# Altium PCB PA_8CH_USER_IFC.PcbDoc (part 1 of 2)
Units mil, origin at the board's own origin, x right, y up, seen from the top; angles counter-clockwise.
Board outline 3070.87 x 1771.65 mil, 2 copper layers (Top Layer, Bottom Layer), stack 61.855 mil thick; 75 components, 89 nets, 332 pads, 99 vias.
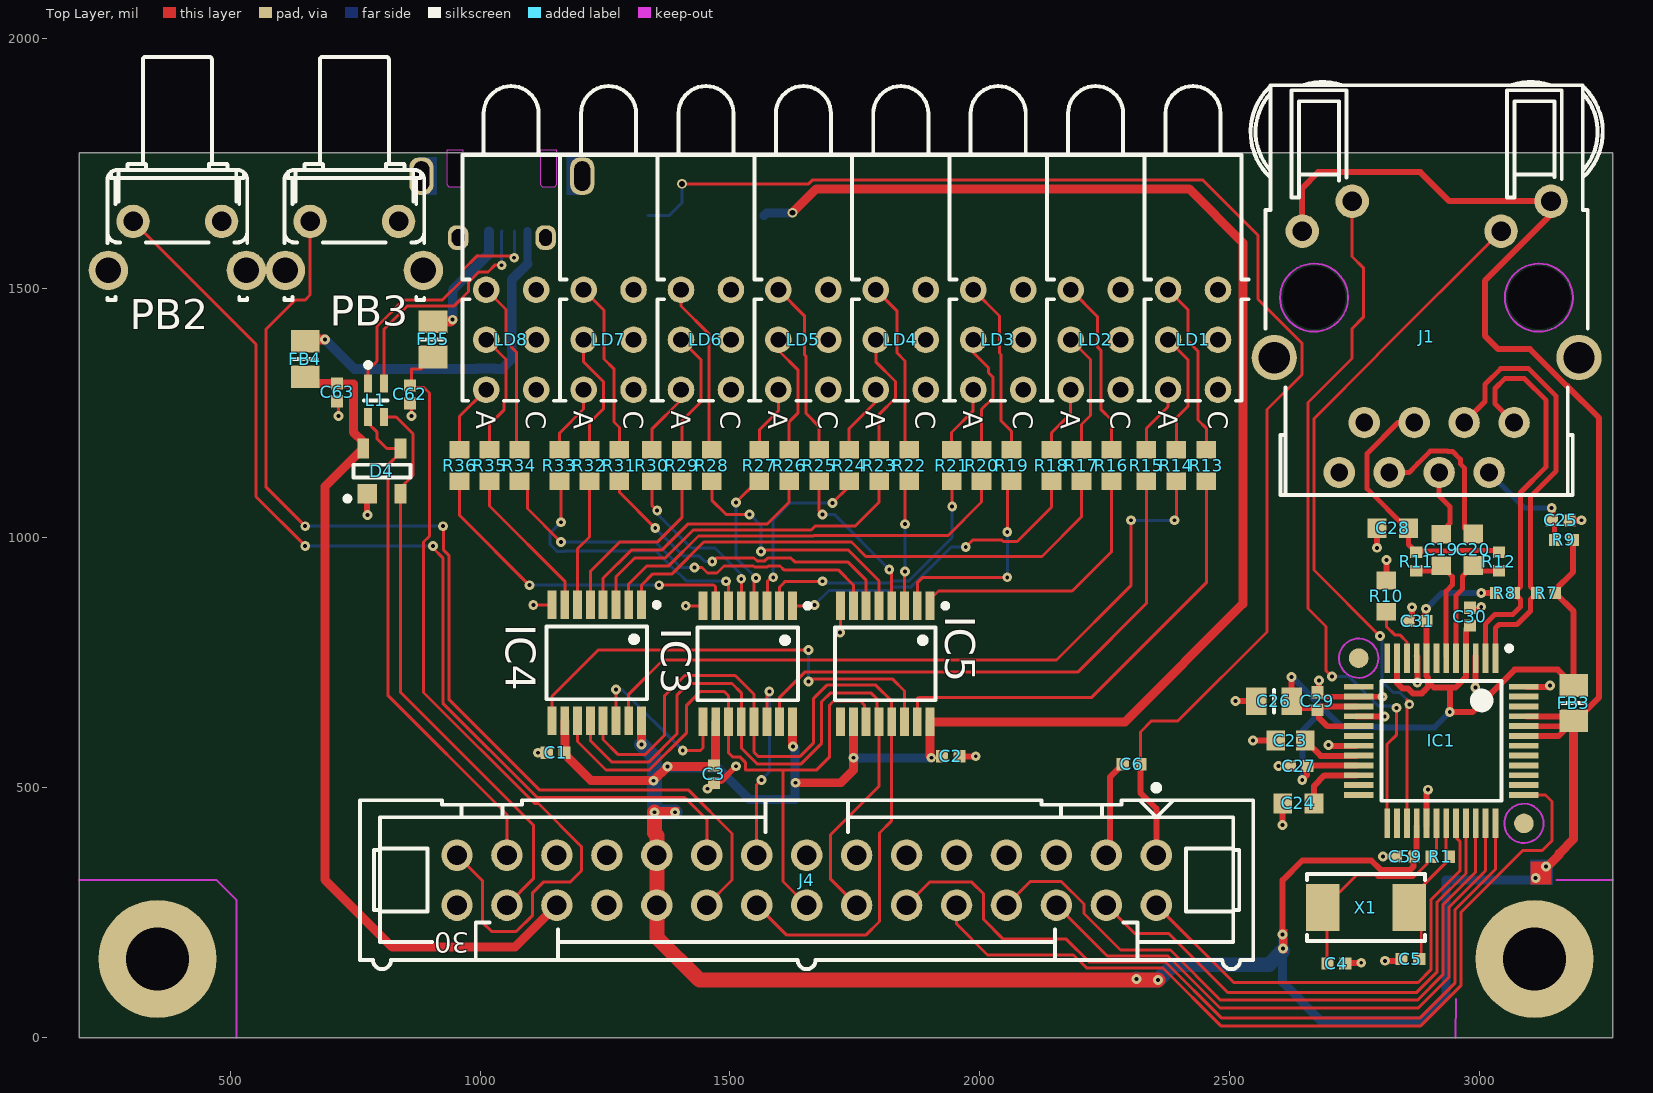
[diagram p0: Top Layer view]
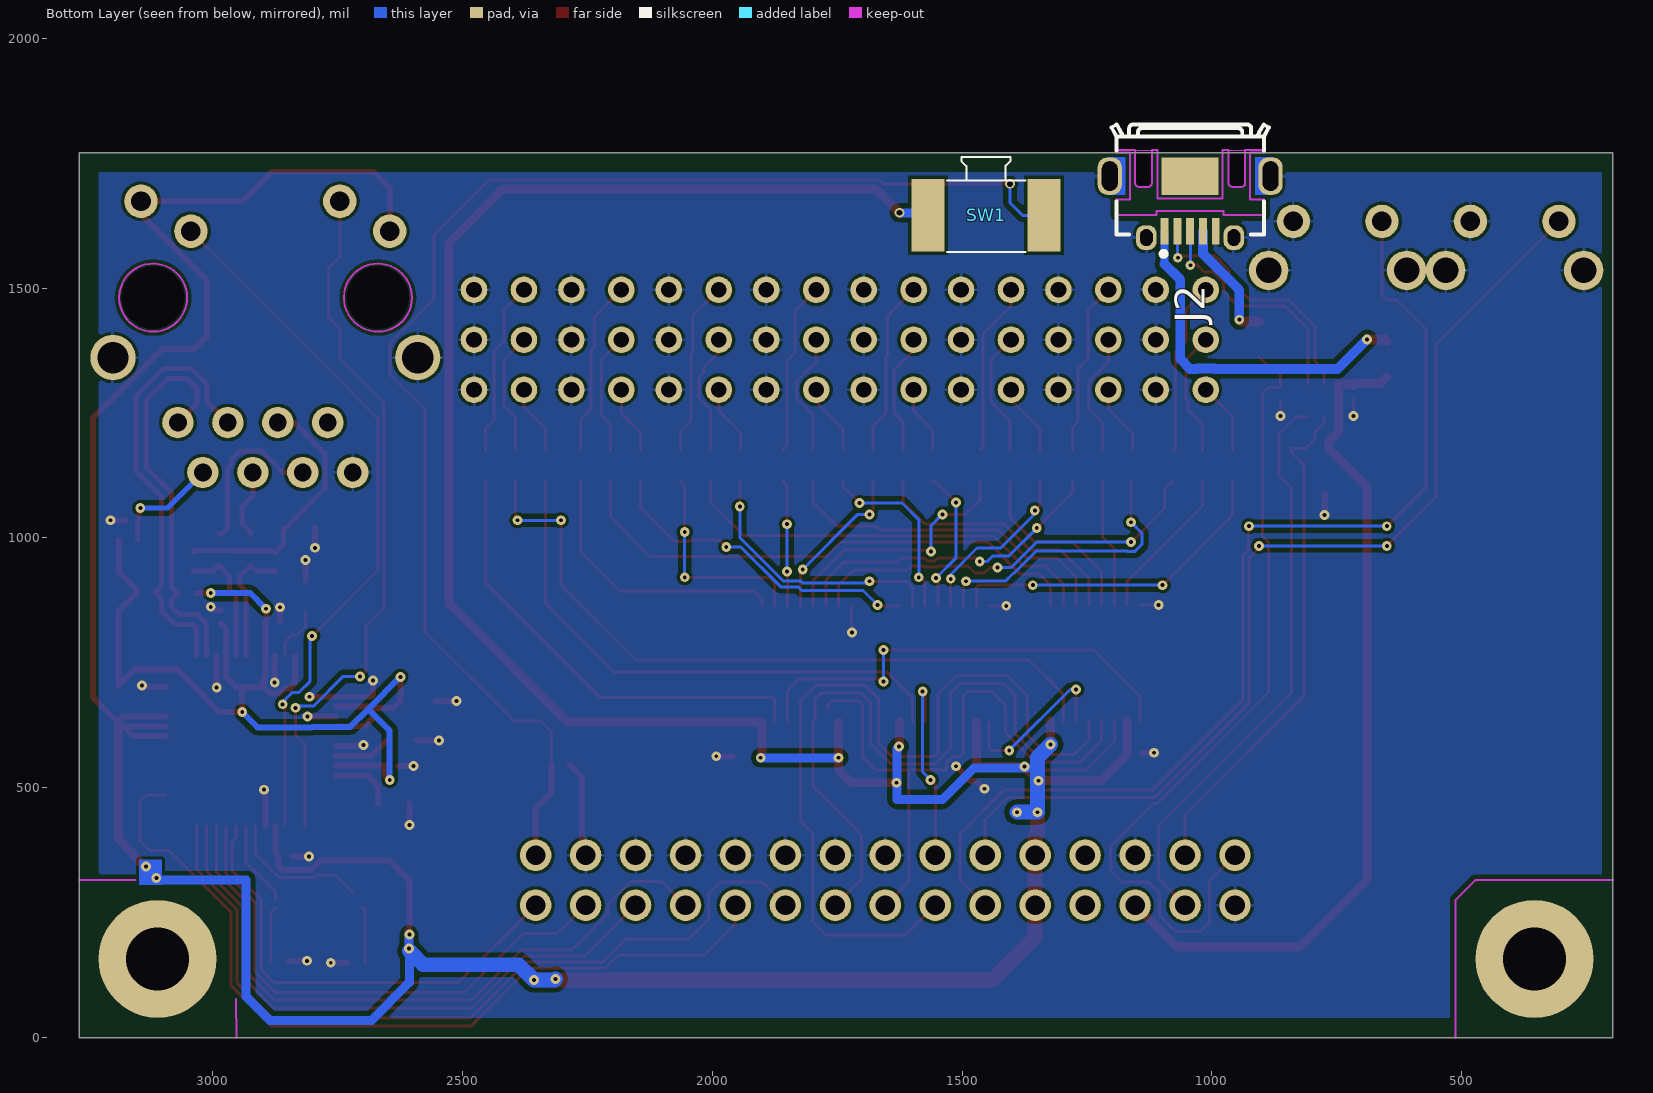
[diagram p1: Bottom Layer view, seen from below]
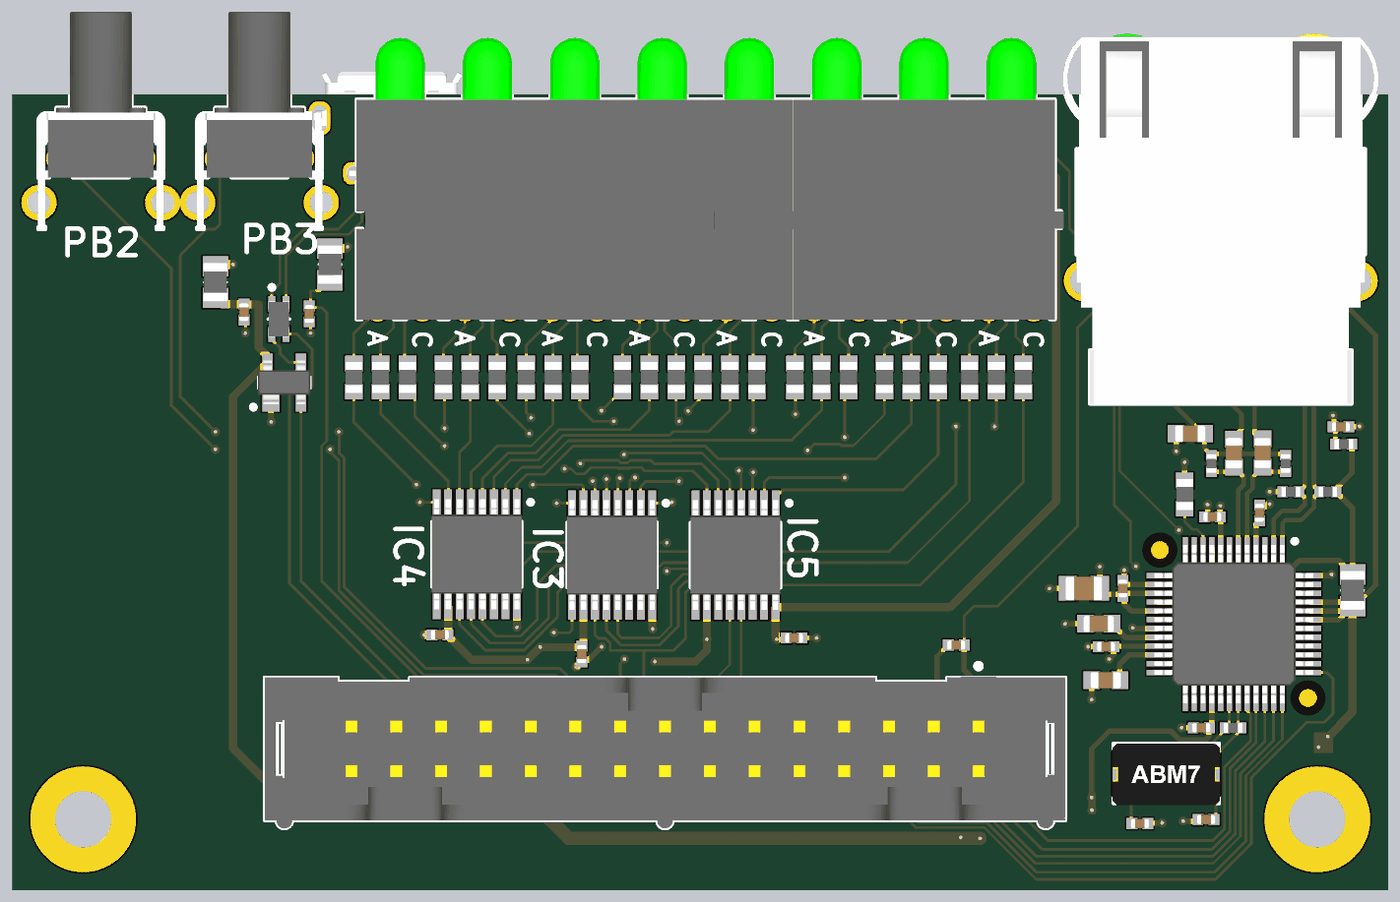
[diagram p2: 3D render of the assembled board from above, using the file's embedded part models]

## Layer stack, top to bottom
Top Solder: solder mask 0.4, Solder Resist, Dk 3.5
Top Layer: signal copper 1.4
Dielectric 1: dielectric 59.0551, FR-4, Dk 4.8
Bottom Layer: signal copper 1.4
Bottom Solder: solder mask 0.4, Solder Resist, Dk 3.5

## Board outline
196.85,0 3267.72,0 3267.72,1771.65 196.85,1771.65

## Design rules (kind name [scope] priority, off if disabled: settings)
Clearance [All] p1: gap=6 ignorepadtopadclearanceinfootprint=FALSE except(0: Arc-Hole Track-Hole SMDPad-Hole THPad-Hole Via-Hole Fill-Hole Poly-Hole Region-Hole Text-Hole; 10: Track-Poly Poly-Poly)
DiffPairsRouting [All] p1: maxlimit=10 minlimit=10 mostfreqgap=10 toplayer_minwidth=10 toplayer_maxwidth=15 toplayer_prefwidth=15 bottomlayer_minwidth=10 bottomlayer_maxwidth=15 bottomlayer_prefwidth=15 maxuncoupledlength=500
HoleSize [All] p1: absolutevalues=TRUE maxlimit=200 minlimit=7.87 maxpercent=80.000 minpercent=20.000
MinimumSolderMaskSliver [All] p1: minsoldermaskwidth=1
PolygonConnect PolygonConnect_pad [IsPad] p1: connectstyle=Relief reliefconductorwidth=6 reliefentries=4 polygonreliefangle="90 Angle" airgapwidth=6
PolygonConnect [All] p2: connectstyle=Direct reliefconductorwidth=10 reliefentries=4 polygonreliefangle="45 Angle" airgapwidth=10
RoomDefinition PA_8CH_USER_IFC [InComponentClass('PA_8CH_USER_IFC')] p1 off: confinementstyle=ConfineIn formatcopy=TRUE lockcomponents=FALSE outline 3370,13 3370,1841 9,1841 9,13
RoomDefinition U_LEDs [InComponentClass('U_LEDs')] p2 off: confinementstyle=ConfineIn formatcopy=TRUE lockcomponents=FALSE outline 3407.76,1921.1 622.76,1921.1 622.76,-13.9 3407.76,-13.9
RoomDefinition U_ETH_IFC [InComponentClass('U_ETH_IFC')] p3 off: confinementstyle=ConfineIn formatcopy=TRUE lockcomponents=FALSE outline 3475.17,1801.1 2519.68,1801.1 2519.68,-33.9 3475.17,-33.9
RoutingVias [All] p1: holewidth=28 width=19.68 viastyle="Through Hole" minholewidth=11.81 minwidth=19.68 maxholewidth=11.81 maxwidth=50
SilkToSilkClearance [All] p1: silktosilkclearance=0
SilkToSolderMaskClearance [IsPad] p1: minsilkscreentomaskgap=0 clearancetoexposedcopper=TRUE
SolderMaskExpansion [All] p1: expansion=4
Width [All] p1: maxlimit=100 minlimit=6 preferedwidth=6
25 further rules are at their usual default settings.

## Classes and differential pairs
component class PA_8CH_USER_IFC: C6 C62 C63 D4 FB4 FB5 J2 J4 L1 PB2 PB3 SW1
component class U_ETH_IFC: C4 C5 C19 C20 C23 C24 C25 C26 C27 C28 C29 C30 C31 C59 FB3 IC1 J1 R1 R7 R8 R9 R10 R11 R12 X1
component class U_LEDs: C1 C2 C3 IC3 IC4 IC5 LD1 LD2 LD3 LD4 LD5 LD6 LD7 LD8 R13 R14 R15 R16 R17 R18 R19 R20 R21 R22 R23 R24 R25 R26 R27 R28 R29 R30 R31 R32 R33 R34 R35 R36
differential pair RJ45_TX: +RJ45_TX_P -RJ45_TX_N
differential pair RJ45_RX: +RJ45_RX_P -RJ45_RX_N
differential pair RJ45_RX_C: +RJ45_RX_C_P -RJ45_RX_C_N

## Components (designator, comment, footprint, x,y, rotation, side; value= is the part's Value field where it differs from the comment)
C1 "100nF" CAPC1005X55N 1151,570 r180 top
C2 "100nF" CAPC1005X55N 1942,563 r0 top
C3 "100nF" CAPC1005X55N 1468,527 r270 top
C4 "22pF" CAPC1005X55N 2714,148 r180 top
C5 "22pF" CAPC1005X55N 2862,157 r0 top
C6 "100nF" CAPC1005X55N 2304,547 r0 top
C19 "10nF" CAPC1608X87N 2924.02,976.1 r90 top
C20 "10nF" CAPC1608X87N 2988.19,976.38 r90 top
C23 "4.7uF" CAPC1709X95N 2622.05,594.49 r180 top
C24 "10nF" CAPC1608X87N 2637.8,468.5 r0 top
C25 "100nF" CAPC1005X55N 3163,1035 r0 top
C26 "10uF" CAPC2012X135N 2589.02,673.58 r180 top
C27 "100nF" CAPC1005X55N 2638.73,543.31 r180 top
C28 "10nF" CAPC1608X87N 2826.77,1019.69 r0 top
C29 "100nF" CAPC1005X55N 2676.02,673.58 r90 top
C30 "100nF" CAPC1005X55N 2981.25,842.52 r90 top
C31 "100nF" CAPC1005X55N 2876.02,833.58 r180 top
C59 "100nF" CAPC1005X55N 2851.33,362.2 r180 top
C62 "100nF" CAPC1005X55N 859.2,1287.4 r90 top
C63 "100nF" CAPC1005X55N 713.54,1291.34 r90 top
D4 "PRTR5V0U2X" SOT190P230X110-4N 803.15,1133.86 r90 top
FB3 "220R@100MHz" INDC2012X105N 3188.98,669.29 r90 top
FB4 "220R@100MHz" INDC2012X105N 649.61,1358.27 r90 top
FB5 "220R@100MHz" INDC2012X105N 905.51,1397.64 r90 top
IC1 "W5500" QFP50P900X900X160-48N 2924,594 r270 top
IC3 "SN74LV595APWT" SOP65P640X120-16N 1535.43,748.03 r270 top
IC4 "SN74LV595APWT" SOP65P640X120-16N 1233.27,750 r270 top
IC5 "SN74LV595APWT" SOP65P640X120-16N 1811.02,748.03 r270 top
J1 "RJ45" TYCO_5-6605308-1 2894.68,1181.1 r180 top locked
J2 "Micro-USB AB 2.0" HIROSE_ZX62RD-AB-5P8 1043.31,1614.17 r0 bottom locked
J4 "Familly" 3M_N2530-6002RB 1653.54,314.96 r180 top locked
L1 "90R@100MHz" IND_MURATA_DLW21S 791.34,1275.59 r270 top
LD1 "Red/Yellow/Green" LED_MENTOR_1882.2781 2426.97,1396.77 r270 top locked
LD2 "Red/Yellow/Green" LED_MENTOR_1882.2781 2231.97,1396.77 r270 top locked
LD3 "Red/Yellow/Green" LED_MENTOR_1882.2781 2036.97,1396.77 r270 top locked
LD4 "Red/Yellow/Green" LED_MENTOR_1882.2781 1841.97,1396.77 r270 top locked
LD5 "Red/Yellow/Green" LED_MENTOR_1882.2781 1646.97,1396.77 r270 top locked
LD6 "Red/Yellow/Green" LED_MENTOR_1882.2781 1451.97,1396.77 r270 top locked
LD7 "Red/Yellow/Green" LED_MENTOR_1882.2781 1256.97,1396.77 r270 top locked
LD8 "Red/Yellow/Green" LED_MENTOR_1882.2781 1061.97,1396.77 r270 top locked
PB2 "Push Button" PB_TYCO_1-1825027-1 393.7,1633.86 r270 top locked
PB3 "Push Button" PB_TYCO_1-1825027-1 748.03,1633.86 r270 top locked
R1 "1M" RESC1005X40N 2922,362 r0 top
R7 "49R9" RESC1005X40N 3133.86,889.76 r0 top
R8 "49R9" RESC1005X40N 3051.18,889.76 r180 top
R9 "10" RESC1005X40N 3169.29,996.06 r180 top
R10 "12k4" RESC1608X55N 2814.02,883.58 r90 top
R11 "49R9" RESC1005X40N 2874.02,952.76 r270 top
R12 "49R9" RESC1005X40N 3039.37,952.76 r270 top
R13 "330" RESC1608X55N 2453.66,1144.96 r90 top
R14 "330" RESC1608X55N 2393.66,1144.96 r90 top
R15 "330" RESC1608X55N 2333.66,1144.96 r90 top
R16 "330" RESC1608X55N 2263.66,1144.96 r90 top
R17 "330" RESC1608X55N 2203.66,1144.96 r90 top
R18 "330" RESC1608X55N 2143.66,1144.96 r90 top
R19 "330" RESC1608X55N 2063.66,1144.96 r90 top
R20 "330" RESC1608X55N 2003.66,1144.96 r90 top
R21 "330" RESC1608X55N 1943.66,1144.96 r90 top
R22 "330" RESC1608X55N 1858.66,1144.96 r90 top
R23 "330" RESC1608X55N 1798.66,1144.96 r90 top
R24 "330" RESC1608X55N 1738.66,1144.96 r90 top
R25 "330" RESC1608X55N 1678.66,1144.96 r90 top
R26 "330" RESC1608X55N 1618.66,1144.96 r90 top
R27 "330" RESC1608X55N 1558.66,1144.96 r90 top
R28 "330" RESC1608X55N 1463.66,1144.96 r90 top
R29 "330" RESC1608X55N 1403.66,1144.96 r90 top
R30 "330" RESC1608X55N 1343.66,1144.96 r90 top
R31 "330" RESC1608X55N 1278.66,1144.96 r90 top
R32 "330" RESC1608X55N 1218.66,1144.96 r90 top
R33 "330" RESC1608X55N 1158.66,1144.96 r90 top
R34 "330" RESC1608X55N 1078.66,1144.96 r90 top
R35 "330" RESC1608X55N 1018.66,1144.96 r90 top
R36 "330" RESC1608X55N 958.66,1144.96 r90 top
SW1 "KSS241G LFS" "KSS241G LFS" 1452,1646 r0 bottom locked
X1 "QSDG25M000-TXC" XTAL_5.0*3.2 2773,260 r0 top

## Footprints (in the part's own frame and the unit in brackets; to place one, negate y for a bottom-side part, rotate by r counter-clockwise, add the part's x,y. Pads: shape width x height; smd on the part's side, far side on the other; paste and mask are expansions set on the pad)
3M_N2530-6002RB [mm] "30 Contacts - Straight .100\" x .100\" Low Profile Four-Wall Header"
  round 1.6 hole 1: 1(-17.78,-1.27) 2(-17.78,1.27) 3(-15.24,-1.27) 4(-15.24,1.27) 5(-12.7,-1.27) 6(-12.7,1.27) 7(-10.16,-1.27) 8(-10.16,1.27) 9(-7.62,-1.27) 10(-7.62,1.27) 11(-5.08,-1.27) 12(-5.08,1.27) 13(-2.54,-1.27) 14(-2.54,1.27) 15(0,-1.27) 16(0,1.27) 17(2.54,-1.27) 18(2.54,1.27) 19(5.08,-1.27) 20(5.08,1.27) 21(7.62,-1.27) 22(7.62,1.27) 23(10.16,-1.27) 24(10.16,1.27) 25(12.7,-1.27) 26(12.7,1.27) 27(15.24,-1.27) 28(15.24,1.27) 29(17.78,-1.27) 30(17.78,1.27)
  silkscreen extent -22.71,-4.85 22.71,4.52, body extent -22.71,-4.11 22.71,4.52, height 9.91
CAPC1005X55N [mm] "Chip Capacitor, Body 1.0x0.55mm, IPC Medium Density"
  rect 0.62x0.62 smd: 1(-0.45,0) 2(0.45,0)
  body extent -0.52,-0.27 0.53,0.28, height 0.55
CAPC1608X87N [mm] "Chip Capacitor, Body 1.6x0.8mm IPC Medium Density"
  rect 0.95x1 smd: 1(-0.8,0) 2(0.8,0)
  body extent -0.87,-0.47 0.88,0.48, height 0.87
CAPC1709X95N [mm] "Capacitor, non-Polarized, Chip; 1.65mm L X 0.85mm W X 0.95mm H,IPC Medium Density"
  rect 0.95x1 smd: 1(-0.75,0) 2(0.75,0)
  body extent -0.87,-0.47 0.88,0.48, height 0.95
CAPC2012X135N [mm] "Chip Capacitor, Body 2.0x1.25mm, IPC Medium Density"
  rect 1.05x1.4 smd: 1(-0.9,0) 2(0.9,0)
  silkscreen extent 0,-0.58 0,0.58, body extent -1.05,-0.67 1.05,0.68, height 1.25
HIROSE_ZX62RD-AB-5P8 [mm] "Right Angle, SMD Micro-USB Type AB - Reverse (Top mount), Shell Through Hole"
  rect 0.4x1.35 smd: 1(1.3,0) 2(0.65,0) 3(0,0) 4(-0.65,0) 5(-1.3,0)
  rrect80% 1.225x1.9 hole 0.8 slot 1.5 at 90 deg: 6(-4.088,-2.8) 6(4.088,-2.8)
  rrect80% 1.05x1.25 hole 0.65 slot 0.85 at 90 deg: 6(-2.225,0.325) 6(2.225,0.325)
  rect 2.9x1.9 smd: PastePad(0,-2.8)
  Top Layer region: 4.2,-3.75 4.2,-1.85 3.3,-1.85 3.3,-1.85 3.3,-3.75
  Top Layer region: -4.2,-1.85 -4.2,-3.75 -3.3,-3.75 -3.3,-3.75 -3.3,-1.85
  Top Layer keep-out lines w0.1: -3.75,-0.825 -1.7,-0.825 -1.7,-1.025 1.7,-1.025 1.7,-0.825 3.75,-0.825 3.75,-1.6 3.05,-1.6 3.05,-4 3.75,-4 3.75,-4.125 2.8,-4.125 2.8,-2.45 ccw(c2.6,-2.45) 2.6,-2.25 2.15,-2.25 ccw(c2.15,-2.45) 1.95,-2.45 1.95,-4.125 1.65,-4.125 1.65,-1.65 -1.65,-1.65 -1.65,-4.125 -1.95,-4.125 -1.95,-2.45 ccw(c-2.15,-2.45) -2.15,-2.25 -2.6,-2.25 ccw(c-2.6,-2.45) -2.8,-2.45 -2.8,-4.125 -3.75,-4.125 -3.75,-4 -3.05,-4 -3.05,-1.6 -3.75,-1.6 -3.75,-0.825
  Keep-Out Layer board cut-out: -2.8,-4.125 -2.8,-2.45 -2.785,-2.373 -2.741,-2.309 -2.676,-2.265 -2.6,-2.25 -2.6,-2.25 -2.15,-2.25 -2.073,-2.265 -2.009,-2.309 -1.965,-2.373 -1.95,-2.45 -1.95,-2.45 -1.95,-4.125
  Keep-Out Layer board cut-out: 1.95,-4.125 1.95,-2.45 1.965,-2.373 2.009,-2.309 2.074,-2.265 2.15,-2.25 2.15,-2.25 2.6,-2.25 2.677,-2.265 2.741,-2.309 2.785,-2.373 2.8,-2.45 2.8,-2.45 2.8,-4.125
  silkscreen extent -4,-5.42 4,1.27, body extent -4.32,-5.42 4.33,0.47, height 2.78
IND_MURATA_DLW21S [mm] "Common Mode Choke Coil, DLW21S Series - Body 2 x 1.2mm"
  rect 0.9x0.4 smd: 1(-0.85,-0.4) 2(0.85,-0.4) 3(0.85,0.4) 4(-0.85,0.4)
  silkscreen extent -1.92,-0.6 0,0.6, body extent -1,-0.6 1,0.6, height 1.4
INDC2012X105N [mm] "Chip Inductor, EIA 0805, Metric 2012, Body 2.0x1.25mm, IPC Medium Density"
  rect 1.15x1.45 smd: 1(-0.9,0) 2(0.9,0)
  silkscreen extent 0,-0.6 0,0.6, body extent -1.1,-0.7 1.1,0.7, height 1.1
"KSS241G LFS" [mm]
  rect 1.7x3.7 smd: 1(-2.95,0) 2(2.95,0)
  silkscreen extent -2,-2.98 1.97,1.88, body extent -3.6,-2.98 3.6,1.7, height 1.65
LED_MENTOR_1882.2781 [mm] "3x LED 3mm (Red+Yellow +Green) PCB Edge Mounting MENTOR 1882.2781"
  round 1.35 hole 0.8: 1(-2.54,1.27) 2(-2.54,-1.27) 3(0,1.27) 4(0,-1.27) 5(2.54,1.27) 6(2.54,-1.27)
  silkscreen extent -12.9,-2.47 3.1,2.83, body extent -12.88,-2.47 3.12,2.98, height 12
PB_TYCO_1-1825027-1 [mm] "Right Angle Micro Miniature Tactile Pushbutton Switche, Round Actuator Length = 5.74mm, FSMRAJ Serie"
  round 1.7 hole 1: 1(0,-2.25) 2(0,2.25)
  round 2 hole 1.3: 3(2.49,-3.505) 4(2.49,3.505)
  silkscreen extent -8.36,-3.56 4,3.56, body extent -8.36,-4.2 4,4.2, height 7.01
QFP50P900X900X160-48N [mm] "QFP, 0.50mm pitch, square, 12 pin X 12 pin, 7.00mm X 7.00mm X 1.60mm Body, IPC Medium Density"
  rect 1.5x0.3 smd: 1(-4.2,2.75) 2(-4.2,2.25) 3(-4.2,1.75) 4(-4.2,1.25) 5(-4.2,0.75) 6(-4.2,0.25) 7(-4.2,-0.25) 8(-4.2,-0.75) 9(-4.2,-1.25) 10(-4.2,-1.75) 11(-4.2,-2.25) 12(-4.2,-2.75) 25(4.2,-2.75) 26(4.2,-2.25) 27(4.2,-1.75) 28(4.2,-1.25) 29(4.2,-0.75) 30(4.2,-0.25) 31(4.2,0.25) 32(4.2,0.75) 33(4.2,1.25) 34(4.2,1.75) 35(4.2,2.25) 36(4.2,2.75)
  rect 0.3x1.5 smd: 13(-2.75,-4.2) 14(-2.25,-4.2) 15(-1.75,-4.2) 16(-1.25,-4.2) 17(-0.75,-4.2) 18(-0.25,-4.2) 19(0.25,-4.2) 20(0.75,-4.2) 21(1.25,-4.2) 22(1.75,-4.2) 23(2.25,-4.2) 24(2.75,-4.2) 37(2.75,4.2) 38(2.25,4.2) 39(1.75,4.2) 40(1.25,4.2) 41(0.75,4.2) 42(0.25,4.2) 43(-0.25,4.2) 44(-0.75,4.2) 45(-1.25,4.2) 46(-1.75,4.2) 47(-2.25,4.2) 48(-2.75,4.2)
  round 1 smd paste-0.51 mask+0.5: FTG1(-4.2,-4.2) FTG2(4.2,4.2)
  Top Layer keep-out circle w0.1: c4.2,4.2 r1
  Top Layer keep-out circle w0.1: c-4.2,-4.2 r1
  silkscreen extent -4.82,-3.05 3.05,3.58, body extent -4.5,-4.5 4.5,4.5, height 1.6
RESC1005X40N [mm] "Chip Resistor, EIA 0402, Metric 1005, Body 1.0x0.5mm, IPC Medium Density"
  rect 0.58x0.62 smd: 1(-0.47,0) 2(0.47,0)
  body extent -0.52,-0.27 0.53,0.28, height 0.4
RESC1608X55N [mm] "Chip Resistor, EIA 0603, Metric 1608, Body 1.6x0.8mm, IPC Medium Density"
  rect 0.9x1 smd: 1(-0.8,0) 2(0.8,0)
  body extent -0.87,-0.47 0.88,0.48, height 0.55
SOP65P640X120-16N [mm] "SOP, 0.65mm pitch; 16 pin, 4.40mm W X 5.00mm L X 1.20mm H body IPC Medium Density"
  rect 1.45x0.45 smd: 1(-2.95,2.275) 2(-2.95,1.625) 3(-2.95,0.975) 4(-2.95,0.325) 5(-2.95,-0.325) 6(-2.95,-0.975) 7(-2.95,-1.625) 8(-2.95,-2.275) 9(2.95,-2.275) 10(2.95,-1.625) 11(2.95,-0.975) 12(2.95,-0.325) 13(2.95,0.325) 14(2.95,0.975) 15(2.95,1.625) 16(2.95,2.275)
  silkscreen extent -3.07,-2.55 1.85,3.17, body extent -3.12,-2.55 3.12,2.55, height 1.2
SOT190P230X110-4N [mm] "SOT143, SOT, 1.90mm Pitch; 4 Pin, 1.30mm W X 2.90mm L X 1.10mm H body, IPC Medium Density"
  rect 1x1 smd: 1(-1.15,0.75)
  rect 1x0.6 smd: 2(-1.15,-0.95) 3(1.15,-0.95) 4(1.15,0.95)
  silkscreen extent -1.52,-1.45 0.33,1.87, body extent -1.25,-1.5 1.25,1.5, height 1.1
TYCO_5-6605308-1 [mm] "1 Port, Yellow/Green LEDs, RJ45 10/100Base-T Ethernet, Mag45 Connector Module With Integrated Magnetics"
  round 1.6 hole 0.9: 1(-4.445,-1.27) 2(-3.175,1.27) 3(-1.905,-1.27) 4(-0.635,1.27) 5(0.635,-1.27) 6(1.905,1.27) 7(3.175,-1.27) 8(4.445,1.27)
  round 2.3 hole 1.6: 9(-7.747,-4.572) 10(7.747,-4.572)
  round 1.7 hole 1: D1(-6.325,-12.522) D2(-3.785,-10.998) D3(6.325,-10.998) D4(3.785,-12.522)
  round 0.5 hole 3.2 unplated mask+1.35: M1(-5.715,-7.62) M2(5.715,-7.62)
  silkscreen extent -8.95,-18.59 8.95,2.41, body extent -8.95,-18.6 8.95,2.41, height 14.97
XTAL_5.0*3.2 [mm]
  rect 1.7x2.4 smd: 1(-2.2,0) 2(2.2,0)
  silkscreen extent -3,-1.7 3,1.7, body extent -3.05,-1.8 3.05,1.7, height 1.44

## Part data
C1 C2 C3 C6 C25 C27 C29 C30 C31 C59 C62 C63: library part CC0402_100NF_16V_10%_X7R, "Non-polarised capacitor", Case=0402, Manufacturer=GENERIC, Manufacturer1 ComponentHeight=0.55mm, Manufacturer1 Example=MURATA, Manufacturer1 Part Number=GRM155R71C104KA88D, Tolerance=±10%, Voltage=16V, Author="CERN DEM JLC", Component Type=Standard, CreateDate=05.12.2013, HelpURL=\\cern.ch\dfs\Applications\Altium\Datasheets\CC0402_X7R_MURATA_GRM.pdf, LatestRevisionDate=03.12.2007, Manufacturer Part Number=CC0402_100NF_16V_10%_X7R, Mounted=Yes, Part Description="SMD Multilayer Chip Ceramic Capacitor", Part Number=CC0402_100NF_16V_10%_X7R, Pin Count=2, Sense=No, SMD=Yes, Socket=No, Status="Not Recommended", TC=X7R
C4 C5: library part CC0402_22PF_50V_5%_NP0, "Non-polarised capacitor", Case=0402, Manufacturer=GENERIC, Manufacturer1 ComponentHeight=0.55mm, Manufacturer1 Example=PHYCOMP, Manufacturer1 Part Number=223886915229, Tolerance=±5%, Voltage=50V, Author="CERN DEM JLC", Component Type=Standard, CreateDate=2007-12-03, HelpURL=\\cern.ch\dfs\Applications\Altium\Datasheets\CC0402_NP0_PHYCOMP.pdf, LatestRevisionDate=2007-12-03, Manufacturer Part Number=CC0402_22PF_50V_5%_NP0, Mounted=Yes, Part Description="SMD Multilayer Chip Ceramic Capacitor", Part Number=CC0402_22PF_50V_5%_NP0, Pin Count=2, SMD=Yes, Socket=No, Status="Not Recommended", Table="Capacitors SMD", TC=NP0
C19 C20 C24 C28: library part CC0603_10NF_50V_5%_C0G, "Non-polarised capacitor", Case=0603, Manufacturer=GENERIC, Manufacturer1 ComponentHeight=0.9mm, Manufacturer1 Example=TDK, Manufacturer1 Part Number=C1608C0G1H103J080AA, Tolerance=±5%, Voltage=50V, Author="CERN DEM JLC", Component Type=Standard, CreateDate=10.12.2014, HelpURL=\\cern.ch\dfs\Applications\Altium\Datasheets\CC0603_C0G_TDK_C.pdf, LatestRevisionDate=10.12.2014, Manufacturer Part Number=CC0603_10NF_50V_5%_C0G, Mounted=Yes, Part Description="SMD Multilayer Chip Ceramic Capacitor", Part Number=CC0603_10NF_50V_5%_C0G, Pin Count=2, Sense=No, SMD=Yes, Socket=No, Status=Preferred, TC=C0G/NP0
C23: library part CC0603_4.7UF_16V_10%_X5R, "Non-polarised capacitor", Case=0603, Manufacturer=GENERIC, Manufacturer1 ComponentHeight=0.95mm, Manufacturer1 Example="TAIYO YUDEN", Manufacturer1 Part Number=EMK107ABJ475KA-T, Tolerance=±10%, Voltage=16V, Author="CERN DEM JLC", Component Type=Standard, CreateDate=16.12.2013, HelpURL=\\cern.ch\dfs\Applications\Altium\Datasheets\CC0603_X7R_TAIYO-YUDEN_HIGH-VALUE.pdf, LatestRevisionDate=16.09.2014, Manufacturer Part Number=CC0603_4.7UF_16V_10%_X5R, Mounted=Yes, Part Description="SMD Multilayer Chip Ceramic Capacitor", Part Number=CC0603_4.7UF_16V_10%_X5R, Pin Count=2, Sense=No, SMD=Yes, Socket=No, Status=None, TC=X5R
C26: library part CC0805_10UF_10V_10%_X7R, "Non-polarised capacitor", Case=0805, Manufacturer=GENERIC, Manufacturer1 ComponentHeight=1.35mm, Manufacturer1 Example=MURATA, Manufacturer1 Part Number=GRM21BR71A106KE51L, Tolerance=±10%, Voltage=10V, Author="CERN DEM JLC", Component Type=Standard, CreateDate=2012-04-30, HelpURL=\\cern.ch\dfs\Applications\Altium\Datasheets\CC0805_X7R_MURATA.pdf, LatestRevisionDate=2012-04-30, Manufacturer Part Number=CC0805_10UF_10V_10%_X7R, Mounted=Yes, Part Description="SMD Multilayer Chip Ceramic Capacitor", Part Number=CC0805_10UF_10V_10%_X7R, Pin Count=2, SMD=Yes, Socket=No, Status=Preferred, Table="Capacitors SMD", TC=X7R
D4: "Ultra Low Capacitance Double Rail-to-Rail ESD Protection Diode", Case=SOT143B, Manufacturer="NXP SEMICONDUCTORS", Voltage=5.5V, Author="CERN DEM JLC", Bonding=No, ComponentHeight=1.1mm, Component Type=Standard, CreateDate=22.03.2011, Device=PRTR5V0U2X, HelpURL=\\cern.ch\dfs\Applications\Altium\Datasheets\PRTR5V0U2X.pdf, LatestRevisionDate=22.03.2011, Manufacturer Part Number=PRTR5V0U2X, Mounted=Yes, PackageDescription="SOT143B, SOT, 1.90mm Pitch; 4 Pin, 1.30mm W X 2.90mm L X 1.10mm H body, IPC Medium Density", Part Description="Ultra Low Capacitance (1pF) Double Rail-to-Rail ESD Protection Diode (8kV)", Part Number=PRTR5V0U2X, Pin Count=4, PressFit=No, Sense=No, SMD=Yes, Socket=No
FB3 FB4 FB5: library part IND0805_MURATA_BLM21PG221SN1D, "Inductor", Case=0805, Manufacturer=MURATA, Manufacturer Part Number=BLM21PG221SN1D, Power=2A, Resistance=0.05R, Tolerance=±25%, Author="CERN DEM JLC", ComponentHeight=1.05mm, Component Type=Standard, CreateDate=2010-01-25, HelpURL=\\cern.ch\dfs\Applications\Altium\Datasheets\IND0402_MURATA_BLM21P.pdf, LatestRevisionDate=2010-01-25, Mounted=Yes, Part Description="SMD EMIFIL Suppression Chip Ferrite Bead", Part Number=IND0805_MURATA_BLM21PG221SN1D, Pin Count=2, SMD=Yes, Socket=No, Status=None, Table="Inductors SMD"
IC1: "iEthernet W5500 TCP/IP Performance and High Speed SPI Ethernet Controller", Case=QFP48, Manufacturer=WIZNET, Author="CERN DEM MR", Bonding=No, ComponentHeight=1.6mm, Component Type=Standard, CreateDate=15.02.2018, Device=W5500, HelpURL=\\cern.ch\dfs\Applications\Altium\Datasheets\W5500.pdf, LatestRevisionDate=15.02.2018, Manufacturer Part Number=W5500, Mounted=Yes, PackageDescription="QFP, 0.50mm Pitch, Square, 48 Pin, 7.00mm L X 7.00mm W X 1.60mm H Body, IPC Medium Density", Part Description="iEthernet W5500 TCP/IP Performance and High Speed SPI Ethernet Controller", Part Number=W5500, Pin Count=48, PressFit=No, Sense=No, SMD=Yes, Socket=No
IC3 IC4 IC5: "8-Bit Shift Register With 3-State Output Register", Case=TSSOP16, Manufacturer="TEXAS INSTRUMENTS", Author="CERN DEM JLC", Bonding=No, ComponentHeight=1.2mm, Component Type=Standard, CreateDate=10.05.2012, Device=SN74LV595APWT, HelpURL=\\cern.ch\dfs\Applications\Altium\Datasheets\SN74LV595APWT.pdf, LatestRevisionDate=10.05.2012, Manufacturer Part Number=SN74LV595APWT, Mounted=Yes, PackageDescription="SOP, 0.65mm pitch; 16 pin, 4.40mm W X 5.00mm L X 1.20mm H body IPC Medium Density", Part Description="8-Bit Shift Register With 3-State Output Register", Part Number=SN74LV595APWT, Pin Count=16, PressFit=No, Sense=No, SMD=Yes, Socket=No
J1: library part TYCO_5-6605308-1, "1 Port, Yellow/Green LEDs, RJ45 10/100Base-T Ethernet, Mag45 Connector Module With Integrated Magnetics", Manufacturer="TYCO ELECTRONICS", Manufacturer Part Number=5-6605308-1, Author="CERN DEM JLC", ComponentHeight=15.24mm, Component Type=Standard, CreateDate=23.08.2012, Family=RJ45, HelpURL=\\cern.ch\dfs\Applications\Altium\Datasheets\TYCO_5-6605308-1.pdf, LatestRevisionDate=23.08.2012, Mounted=Yes, Part Description="1 Port, Yellow/Green LEDs, RJ45 10/100Base-T Ethernet, Mag45 Connector Module With Integrated Magnetics", Part Number=TYCO_5-6605308-1, Pin Count=14, PressFit=No, Sense=No, SMD=No, Socket=No, Status=None
J2: library part HIROSE_ZX62RD-AB-5P8, "5 Pin + 1 Shield USB Receptacle", Manufacturer="HIROSE (HRS)", Manufacturer Part Number=ZX62RD-AB-5P8, Author="CERN DEM JLC", ComponentHeight=2.35mm, ComponentLink1Description=Package-Drawing, ComponentLink1URL=\\cern.ch\dfs\Applications\Altium\Datasheets\HIROSE_ZX62RD-AB-5P8_Package-Drawing.pdf, Component Type=Standard, CreateDate=29.10.2014, Family="Micro-USB AB 2.0", HelpURL=\\cern.ch\dfs\Applications\Altium\Datasheets\HIROSE_ZX62RD-AB-5P8.pdf, LatestRevisionDate=29.10.2014, Mounted=Yes, Part Description="Micro-USB 2.0 Right Angle, SMD Type AB - Reverse (Top mount), Shell Through Hole", Part Number=HIROSE_ZX62RD-AB-5P8, Pin Count=7, PressFit=No, Sense=No, SMD=Yes, Socket=No, Status=None
J4: library part 3M_N2530-6002RB, "Connector 30 Male", Manufacturer=3M, Manufacturer Part Number=N2530-6002RB, Author="CERN DEM JLC", ComponentHeight=10.03mm, Component Type=Standard, CreateDate=11.02.2009, Family="Header 30", HelpURL=\\cern.ch\dfs\Applications\Altium\Datasheets\3M_N2530-6002RB.pdf, LatestRevisionDate=11.08.2009, Mounted=Yes, Part Description="30 Contacts - Straight .100'' x .100'' Low Profile Four-Wall Header, 2500 Series", Part Number=3M_N2530-6002RB, Pin Count=30, PressFit=No, Sense=No, SMD=No, Socket=No, Status=None
L1: library part IND_MURATA_DLW21SN900SQ2L, "Inductor Common Mode", Case=0805, Manufacturer=MURATA, Manufacturer Part Number=DLW21SN900SQ2L, Power=330mA, Resistance=0.35R, Tolerance=±25%, Author="CERN DEM JLC", ComponentHeight=1.4mm, Component Type=Standard, CreateDate=01.07.2014, HelpURL=\\cern.ch\dfs\Applications\Altium\Datasheets\IND_MURATA_DLW21S.pdf, LatestRevisionDate=01.07.2014, Mounted=Yes, Part Description="Wire Wound Common Mode Choke Coil (DLW21S Series)", Part Number=IND_MURATA_DLW21SN900SQ2L, Pin Count=4, Sense=No, SMD=Yes, Socket=No, Status=None
LD1 LD2 LD3 LD4 LD5 LD6 LD7 LD8: library part LED_MENTOR_1882.2781, "LED x3 G-1C2A-BOT_Y-3C4A_R-5C6A-TOP", Manufacturer=MENTOR, Manufacturer Part Number=1882.2781, Author="CERN DEM JLC", Bonding=No, Color=Red/Yellow/Green, ComponentHeight=12mm, Component Type=Standard, CreateDate=03.02.2009, HelpURL=\\cern.ch\dfs\Applications\Altium\Datasheets\LED_MENTOR_1882.2781.pdf, LatestRevisionDate=17.03.2010, Mounted=Yes, PackageDescription="3x LED 3mm (Red+Yellow +Green) PCB Edge Mounting MENTOR 1882.2781", Part Description="Triple 3mm LEDs, Red Top, Yellow Mid, Green Bot, PCB Edge Mounting", Part Number=LED_MENTOR_1882.2781, Pin Count=6, PressFit=No, Sense=No, SMD=No, Socket=No
PB2 PB3: library part PB_TYCO_1-1825027-1, "Push-Button Switch SPDT", Manufacturer="TYCO ELECTRONICS", Manufacturer Part Number=1-1825027-1, Author="CERN DEM JLC", ComponentHeight=7.01mm, Component Type=Standard, CreateDate=17.04.2013, Family="Push Button", HelpURL=\\cern.ch\dfs\Applications\Altium\Datasheets\PB_TYCO_1-1825027-1.pdf, LatestRevisionDate=28.10.2013, Mounted=Yes, PackageDescription="Right Angle Micro Miniature Tactile Pushbutton Switch, Round Actuator Length = 5.74mm, FSMRAJ Serie", Part Description="Right Angle Micro Miniature Tactile Pushbutton Switch, Round Actuator Length = 5.74mm, FSMRAJ Serie", Part Number=PB_TYCO_1-1825027-1, Pin Count=4, PressFit=No, Sense=No, SMD=No, Socket=No, Status=None
R1: library part R0402_1M_1%_0.0625W_100PPM, "Resistor - 1%", Case=0402, Manufacturer=GENERIC, Manufacturer1 ComponentHeight=0.4mm, Manufacturer1 Example="YAGEO PHYCOMP", Manufacturer1 Part Number=232270671005L, Power=0.0625W, Tolerance=±1%, Author="CERN DEM JLC", Component Type=Standard, CreateDate=03.12.2007, HelpURL=\\cern.ch\dfs\Applications\Altium\Datasheets\R0402_Phycomp_RC0402.pdf, LatestRevisionDate=17.10.2012, Manufacturer Part Number=R0402_1M_1%_0.0625W_100PPM, Mounted=Yes, Part Description="General Purpose Thick Film Chip Resistor", Part Number=R0402_1M_1%_0.0625W_100PPM, Pin Count=2, Sense=No, SMD=Yes, Socket=No, Status="Not recommended", TC=±100ppm/°C
R7 R8 R11 R12: library part R0402_49R9_1%_0.0625W_100PPM, "Resistor - 1%", Case=0402, Manufacturer=GENERIC, Manufacturer1 ComponentHeight=0.4mm, Manufacturer1 Example="YAGEO PHYCOMP", Manufacturer1 Part Number="232270674999L or RC0402FR-0749R9L", Power=0.0625W, Tolerance=±1%, Author="CERN DEM JLC", Component Type=Standard, CreateDate=2012-10-24, HelpURL=\\cern.ch\dfs\Applications\Altium\Datasheets\R0402_Phycomp_RC0402.pdf, LatestRevisionDate=2012-10-24, Manufacturer Part Number=R0402_49R9_1%_0.0625W_100PPM, Mounted=Yes, Part Description="General Purpose Thick Film Chip Resistor", Part Number=R0402_49R9_1%_0.0625W_100PPM, Pin Count=2, SMD=Yes, Socket=No, Status="Not recommended", Table="Resistors SMD", TC=±100ppm/°C
R9: library part R0402_10R_1%_0.0625W_200PPM, "Resistor - 1%", Case=0402, Manufacturer=GENERIC, Manufacturer1 ComponentHeight=0.4mm, Manufacturer1 Example="YAGEO PHYCOMP", Manufacturer1 Part Number=232270671009L, Power=0.0625W, Tolerance=±1%, Author="CERN DEM JLC", Component Type=Standard, CreateDate=24.06.2009, HelpURL=\\cern.ch\dfs\Applications\Altium\Datasheets\R0402_Phycomp_RC0402.pdf, LatestRevisionDate=17.10.2012, Manufacturer Part Number=R0402_10R_1%_0.0625W_200PPM, Mounted=Yes, Part Description="General Purpose Thick Film Chip Resistor", Part Number=R0402_10R_1%_0.0625W_200PPM, Pin Count=2, Sense=No, SMD=Yes, Socket=No, Status="Not recommended", TC=±200ppm/°C
R10: library part R0603_12K4_0.1%_0.063W_10PPM, "Resistor - 0.1%", Case=0603, Manufacturer=GENERIC, Manufacturer1 ComponentHeight=0.5mm, Manufacturer1 Example="TYCO HOLSWORTHY", Manufacturer1 Part Number=RN73C1J12K4BTDF, Power=0.063W, Tolerance=±0.1%, Author="CERN DEM JLC", Component Type=Standard, CreateDate=03.12.2007, HelpURL=\\cern.ch\dfs\Applications\Altium\Datasheets\R0603_Tyco_RN73.pdf, LatestRevisionDate=13.03.2008, Manufacturer Part Number=R0603_12K4_0.1%_0.063W_10PPM, Mounted=Yes, Part Description="Thin Film Chip Resistor", Part Number=R0603_12K4_0.1%_0.063W_10PPM, Pin Count=2, Sense=No, SMD=Yes, Socket=No, Status="Not recommended", TC=±10ppm
R13 R14 R15 R16 R17 R18 R19 R20 R21 R22 R23 R24 R25 R26 R27 R28 R29 R30 R31 R32 R33 R34 R35 R36: library part R0603_330R_1%_0.1W_100PPM, "Resistor - 1%", Case=0603, Manufacturer=GENERIC, Manufacturer1 ComponentHeight=0.55mm, Manufacturer1 Example="NIC COMPONENT", Manufacturer1 Part Number=NRC06F3300TRF, Power=0.1W, Tolerance=±1%, Author="CERN DEM JLC", Component Type=Standard, CreateDate=2007-12-03, HelpURL=\\cern.ch\dfs\Applications\Altium\Datasheets\R0603_NIC_NRC.pdf, LatestRevisionDate=2008-03-13, Manufacturer Part Number=R0603_330R_1%_0.1W_100PPM, Mounted=Yes, Part Description="General Purpose Thick Film Chip Resistor", Part Number=R0603_330R_1%_0.1W_100PPM, Pin Count=2, SMD=Yes, Socket=No, Status=Preferred, Table="Resistors SMD", TC=±100ppm/°C
SW1: library part SW-TACT_SMD_RA_mini, "Push button", Supplier Part Number 1=1437640, Supplier 1=Farnell
X1: library part X_CRYSTAL_SMD_5.0*3.2, "miniature crystal oscillator (Maritex)"

## Free pads (board coordinates)
  round 236.22 hole 125.98 unplated: 0(354.33,157.48) 1(3110.24,157.48)

## Via types
v1: diameter 19.68, hole 7.87, Top Layer to Bottom Layer, tented both sides, 97 vias
v2: diameter 19.68, hole 11.81, Top Layer to Bottom Layer, 2 vias

## Nets (pads, with @x,y where several pads share a name; then routed paths per layer and width w, separated by ;. In a path a pad name is that pad's centre, name@x,y a point inside that pad or via, vN(x,y) a via of type N, cw(c..) or ccw(c..) an arc to the next point about the centre after c; other vN are vias at no path point)
BOOT: C6.2 J4.1 SW1.1 | length 2774.4
  Top Layer w6: v2(1404,1709) 1657.54,1709 1665.54,1717 2446,1717 2557,1606 2557,1478 2645,1390 2645,1327 2575,1257 2575,812 2397,634 2344,634 2321.72,611.72 C6.2
  Top Layer w12: C6.2 2321.72,490.28 2353.54,458.46 J4.1
  Bottom Layer w6: SW1.1 1379,1646 1404,1671 v2(1404,1709)
GND: C1.2 C2.2 C3.2 C4.1 C5.1 C6.1 C23.2 C24.1 C25.2 C26.2 C27.2 C28.1 C29.2 C30.2 C31.2 C59.2 C62.1 C63.1 D4.1 IC1.3 IC1.9 IC1.14 IC1.16 IC1.19 IC1.29 IC1.48 IC3.8 IC4.8 IC5.8 J1.8 J1.9 J1.10 J2.5 J2.6 J4.3 J4.5 J4.7 J4.9 J4.11 J4.13 J4.15 J4.25 J4.30 LD1.1 LD1.3 LD1.5 LD2.1 LD2.3 LD2.5 LD3.1 LD3.3 LD3.5 LD4.1 LD4.3 LD4.5 LD5.1 LD5.3 LD5.5 LD6.1 LD6.3 LD6.5 LD7.1 LD7.3 LD7.5 LD8.1 LD8.3 LD8.5 PB2.2 PB2.3 PB2.4 PB3.2 PB3.3 PB3.4 R10.2 | length 1498.5
  Top Layer w6: v1(716.54,1244.09) C63.1@716.54,1277.56 ; v1(862.2,1244.09) C62.1@862.2,1273.62 ; v1(1106.3,866.14) IC4.8 ; v1(1411.42,864.17) IC3.8 ; v1(1720.47,811.02) 1721.46,812.01 IC5.8
  Top Layer w12: D4.1 773.62,1046.65 v1(774.28,1046) ; v1(1116,570) C1.2 C1.2@1140.22,570 ; v1(1455,498) 1455.78,498 1471,513.22 1482.22,513.22 v1(1512,543) ; C2.2@1958.78,563 C2.2 v1(1992,563) ; J4.3 2261,372.41 2261,521.72 C6.1 ; v1(2512.17,673.58) C26.2 ; v1(2547.24,594.49) C23.2 ; v1(2598.43,543.31) C27.2 C27.2@2627.95,543.31 ; v1(2606.3,425.2) C24.1 ; v1(2679.02,714.45) 2679.02,687.36 2684.21,682.17 v1(2806.02,682.17) ; v1(2697.91,585.55) 2697.91,583.74 IC1.19@2753.74,583.74 ; C4.1@2730.31,149.61 v1(2763.78,149.61) ; IC1.16@2753.74,642.8 v1(2809.96,642.8) ; v1(2795.28,980.32) C28.1 ; v1(2807.09,362.2) C59.2 C59.2@2840.55,362.2 ; v1(2811.02,153.54) C5.1@2848.43,153.54 ; R10.2 v1(2814.02,955.75) ; C31.2@2865.24,833.58 v1(2865.24,861.3) ; IC1.9@2874.8,763.86 2876,762.66 v1(2876,711) ; IC1.29@2894.49,423.31 2894.49,492.91 v1(2897.64,496.06) ; C30.2@2984.25,856.3 2998.03,856.3 v1(3003.94,862.2) ; v1(2992.13,700.79) 2992.91,701.57 IC1.3@2992.91,763.86 ; IC1.48@3094.29,701.85 3144.61,701.85 v1(3141.73,704.72) ; C25.2@3175.2,1035.43 v1(3204.72,1035.43)
INT: IC1.36 J4.12 | length 1636.1
  Top Layer w6: J4.12 1899.61,311.02 1984.25,311.02 2007.87,287.4 2007.87,236.22 2047.24,196.85 2173.23,196.85 2219.08,151 2371.91,151 2483.54,39.37 2881.73,39.37 2951,108.64 2951,255.37 3032.28,336.66 IC1.36@3032.28,423.31
LED_CS: IC3.12 IC4.12 IC5.12 J4.14 | length 1462.6
  Top Layer w6: IC4.12 1220.47,594.49 1263.78,551.18 1337.36,551.18 1393.7,607.52 1393.7,685.04 1417.32,708.66 1503.94,708.66 1522.64,689.96 IC3.12 1522.64,579.72 1555.12,547.24 1641.73,547.24 1683.6,589.11 1683.6,672.45 1700.59,689.43 1783.01,689.43 1794.5,677.94 1794.5,635.62 IC5.12 1798.23,502.95 1700.79,405.51 1700.79,317.71 J4.14
LED_GREEN_CH0: IC5.15 R13.1 | length 924.2
  Top Layer w6: IC5.15 1875,678.15 1877.95,681.1 2224.41,681.1 2453.66,910.35 R13.1
LED_GREEN_CH1: IC5.1 R16.1 | length 556.5
  Top Layer w6: IC5.1 1900.59,876.97 1917.32,893.7 2185.04,893.7 2263.66,972.32 R16.1
LED_GREEN_CH2: IC5.2 R19.1 | length 426.6
  Top Layer w6: IC5.2 1875,910.43 1885.83,921.26 v1(2055.12,921.26) ; v1(2055.12,1011.81) 2055.12,1104.92 R19.1
  Bottom Layer w6: v1(2055.12,921.26) v1(2055.12,1011.81)
LED_GREEN_CH3: IC5.3 R22.1 | length 253.1
  Top Layer w6: IC5.3 1849.41,932.09 v1(1850.39,933.07) ; v1(1850.39,1027.56) 1850.39,1105.2 R22.1
  Bottom Layer w6: v1(1850.39,933.07) v1(1850.39,1027.56)
LED_GREEN_CH4: IC5.4 R25.1 | length 325.6
  Top Layer w6: R25.1 1678.66,1053.62 v1(1685.04,1047.24) ; v1(1818.89,937.01) 1822.84,937.01 1823.82,936.02 IC5.4
  Bottom Layer w6: v1(1685.04,1047.24) 1708.66,1047.24 v1(1818.89,937.01)
LED_GREEN_CH5: IC5.5 R28.1 | length 524
  Top Layer w6: R28.1 1463.66,1075.71 1492.13,1047.24 v1(1539.37,1047.24) ; v1(1562,973) 1562,975.76 1562.62,976.38 1736.22,976.38 1798.23,914.37 IC5.5
  Bottom Layer w6: v1(1539.37,1047.24) 1562,1024.61 v1(1562,973)
LED_GREEN_CH6: IC5.6 R31.1 | length 651.1
  Top Layer w6: R31.1 1278.66,1091.42 v1(1350.39,1019.69) ; v1(1464.57,952.76) 1471.91,960.1 1548.25,960.1 1554.2,954.16 1569.8,954.16 1575.75,960.1 1621.77,960.1 1629.64,952.23 1735.75,952.23 1772.64,915.34 IC5.6
  Bottom Layer w6: v1(1350.39,1019.69) 1406.29,963.79 1438.6,963.79 1449.63,952.76 v1(1464.57,952.76)
LED_GREEN_CH7: IC5.7 R34.1 | length 832
  Top Layer w6: R34.1 1094.49,1097.64 1094.49,1059.06 v1(1161.42,992.13) ; v1(1429.13,940.94) 1444.07,940.94 1455.11,929.91 1474.03,929.91 1488.22,944.1 1547.28,944.1 1549.22,942.16 1574.78,942.16 1576.72,944.1 1600.01,944.1 1607.89,936.23 1716.64,936.23 1747.05,905.82 IC5.7
  Bottom Layer w6: v1(1161.42,992.13) 1350.39,992.13 1401.57,940.94 v1(1429.13,940.94)
LED_OEN: IC3.13 IC4.13 IC5.13 J4.18 | length 1731.5
  Top Layer w6: IC4.13 1246.06,596.46 1275.59,566.93 1330.71,566.93 1368.57,604.79 1368.57,683.53 1409.7,724.66 1510.56,724.66 1548.23,687 IC3.13 1548.23,571.1 1556.34,562.99 1640.51,562.99 1667.6,590.08 1667.6,679.07 1693.96,705.43 1791.92,705.43 1823.82,673.53 IC5.13 1823.82,434.06 1799.21,409.45 1799.21,232.28 1771.65,204.72 1613.78,204.72 J4.18
LED_RED_CH0: IC3.15 R15.1 | length 1105.7
  Top Layer w6: IC3.15 1599.41,681.17 1649.68,731.44 2196.01,731.44 2333.66,869.09 R15.1
LED_RED_CH1: IC3.1 R18.1 | length 654.8
  Top Layer w6: IC3.1 1667.32,864.17 v1(1669.29,866.14) ; v1(1972,982) 1986,996 2044.28,996 2047.31,992.97 2074.97,992.97 2143.66,1061.66 R18.1
  Bottom Layer w6: v1(1669.29,866.14) 1698.15,895 1821,895 1828.23,902.23 1863.17,902.23 1942.94,982 v1(1972,982)
LED_RED_CH2: IC3.2 R21.1 | length 540.3
  Top Layer w6: IC3.2 1599.41,901.75 1609.45,911.8 1609.45,912.6 1684.26,912.6 v1(1685.04,913.39) ; R21.1 1944.88,1112.24 v1(1944.88,1062.99)
  Bottom Layer w6: v1(1685.04,913.39) 1688.2,910.23 1819.26,910.23 1823.26,914.23 1858.2,914.23 1944.88,1000.91 v1(1944.88,1062.99)
LED_RED_CH3: IC3.3 R24.1 | length 369.7
  Top Layer w6: IC3.3 1575.17,865.52 1575.17,913.75 1582.68,921.26 v1(1586.61,921.26) ; v1(1705,1070) 1738.66,1103.66 R24.1
  Bottom Layer w6: v1(1586.61,921.26) 1586.61,1036.61 1620.09,1070.09 v1@1705,1070.09
LED_RED_CH4: IC3.4 R27.1 | length 289.7
  Top Layer w6: v1(1511.81,1070.87) 1554.41,1113.46 R27.1 ; IC3.4 1548.23,916.02 v1(1552.32,920.12)
  Bottom Layer w6: v1(1511.81,1070.87) 1511.81,960.63 v1(1552.32,920.12)
LED_RED_CH5: IC3.5 R30.1 | length 351.1
  Top Layer w6: R30.1 1343.66,1065.79 v1(1354.33,1055.12) ; IC3.5 v1(1522.64,918.31)
  Bottom Layer w6: v1(1354.33,1055.12) 1354.33,1048.05 1422.6,979.79 1469.84,979.79 1522.64,926.99 v1(1522.64,918.31)
LED_RED_CH6: IC3.6 R33.1 | length 573.3
  Top Layer w6: R33.1 1161.42,1110.71 v1(1161.42,1031.5) ; v1(1492.12,913.38) 1496.06,913.38 1497.05,912.4 IC3.6
  Bottom Layer w6: v1(1161.42,1031.5) 1140,1010.08 1140,986.9 1153.61,973.28 1169.22,973.28 1169.94,974 1351.54,974 1396.6,928.94 1398.06,928.94 1413.62,913.38 v1(1492.12,913.38)
LED_RED_CH7: IC3.7 R36.1 | length 678.2
  Top Layer w6: R36.1 958.66,1045.28 v1(1098.43,905.51) ; v1(1358.27,905.51) 1431.42,905.51 1431.62,905.72 1467.49,905.72 1471.46,901.75 IC3.7
  Bottom Layer w6: v1(1098.43,905.51) v1(1358.27,905.51)
LED_SCK: IC3.11 IC4.11 IC5.11 J4.16 | length 1296.7
  Top Layer w6: IC4.11 1194.88,592.52 1251.97,535.43 1338.58,535.43 1413.39,610.24 1413.39,665.35 1440.69,692.66 1488.44,692.66 1497.05,684.06 IC3.11 1497.05,569.88 1505.09,561.84 1519.8,561.84 1530.84,550.8 1530.84,536.09 1531.75,535.18 1606.3,535.18 ; J4.16 1606.3,312.2 1606.3,535.18 ; IC5.11@1768.91,657.43 1768.91,665.82 1761.29,673.43 1707.21,673.43 1699.6,665.82 1699.6,561.8 1672.98,535.18 1606.3,535.18
LED_SDI: IC3.14 J4.17 | length 401.5
  Top Layer w6: J4.17 1553.54,506.3 v1(1562.99,515.75) ; IC3.14 1573.82,687.99 v1(1578.74,692.91)
  Bottom Layer w6: v1(1562.99,515.75) 1578.74,531.5 v1(1578.74,692.91)
LED_YELLOW_CH0: IC4.15 R14.1 | length 1445.7
  Top Layer w6: IC4.15 1297.24,687.01 1366.14,755.91 2153.54,755.91 2303.15,905.51 v1(2303.15,1035.43) ; v1(2389.76,1035.43) 2393.66,1039.33 R14.1
  Bottom Layer w6: v1(2303.15,1035.43) v1(2389.76,1035.43)
LED_YELLOW_CH1: IC4.1 R17.1 | length 1071.8
  Top Layer w6: IC4.1 1322.83,905.51 1345.68,928.35 1384.24,928.35 1447.73,991.84 1743.38,991.84 1772.07,963.16 2124.57,963.16 2203.66,1042.24 R17.1
LED_YELLOW_CH2: IC4.2 R20.1 | length 857.7
  Top Layer w6: IC4.2 1297.24,907.79 1333.81,944.35 1377.61,944.35 1437.1,1003.84 1667.68,1003.84 1668.55,1004.72 1936.56,1004.72 2003.66,1071.82 R20.1
LED_YELLOW_CH3: IC4.3 R23.1 | length 686.7
  Top Layer w6: IC4.3 1271.65,922.25 1309.75,960.35 1370.98,960.35 1426.47,1015.84 1662.71,1015.84 1671.27,1024.4 1751.24,1024.4 1798.66,1071.82 R23.1
LED_YELLOW_CH4: IC4.4 R26.1 | length 530.6
  Top Layer w6: IC4.4 1246.06,919.29 1303.13,976.35 1364.36,976.35 1416.4,1028.4 1575.24,1028.4 1618.66,1071.82 R26.1
LED_YELLOW_CH5: IC4.5 R29.1 | length 367.5
  Top Layer w6: IC4.5 1220.47,933.07 1279.76,992.35 1355.37,992.35 1403.66,1040.65 R29.1
LED_YELLOW_CH6: IC4.6 R32.1 | length 257.2
  Top Layer w6: IC4.6 1194.88,978.35 1218.66,1002.13 R32.1
LED_YELLOW_CH7: IC4.7 R35.1 | length 309.7
  Top Layer w6: R35.1 1018.66,1064.02 1169.29,913.39 IC4.7
NetC4_2: C4.2 IC1.30 R1.1 X1.1 | length 398.5
  Top Layer w6: C4.2@2694.88,149.61 2694.88,253.94 X1.1@2700.79,259.84 ; 2720.47,291.34 2754.5,325.36 2791.83,325.36 2797.19,320 2867.21,320 2914.17,366.96 IC1.30@2914.17,423.31
NetC5_2: C5.2 IC1.31 R1.2 X1.2 | length 282.9
  Top Layer w6: X1.2@2874.02,259.84 2883.86,250 C5.2@2883.86,153.54 ; X1.2@2874.02,275.59 2874.02,291.02 2933.86,350.86 IC1.31@2933.86,423.31
NetC23_1: C23.1 IC1.20 | length 115.1
  Top Layer w12: C23.1 2682.35,563.71 2753.39,563.71 IC1.20@2753.74,564.06
NetC24_2: C24.2 IC1.22 | length 128.5
  Top Layer w12: C24.2 2669.29,503.94 2690.04,524.69 IC1.22@2753.74,524.69
NetC25_1: C25.1 J1.2 R9.2 | length 221.5
  Top Layer w10: v1(3145,1060) 3147.64,1057.36 3147.64,1035.43 3150.79,1032.28 R9.2
  Bottom Layer w10: J1.2@3019.31,1131.17 3090.48,1060 v1(3145,1060)
NetC28_2: C28.2 J1.5 R11.1 R12.1 | length 530.3
  Top Layer w10: J1.5@2869.31,1231.17 2837.47,1231.17 2775.59,1169.29 2775.59,1098.43 2854.33,1019.69 C28.2 2858.27,987.01 R11.1 2874.02,974.31 2960.62,974.31 2960.9,974.58 3036.05,974.58 R12.1
NetC62_2: C62.2 FB5.1 J4.29 | length 1666
  Top Layer w6: FB5.1 881.89,1338.58 862.2,1338.58 862.2,1301.18 887.09,1301.18 898.28,1290 898.28,1003.66 886.67,992.05 886.67,690.85 1109.2,468.32 1116.68,468.32 1203,382 1203,334 1180,311 1126,311 1105,290 1105,245 1072,212 1023,212 1005,230 1005,313.5 J4.29
NetC63_2: C63.2 D4.4 FB4.1 J4.26 | length 1691.8
  Top Layer w18: FB4.1 663.39,1309.06 C63.2 ; 688.98,1102.66 688.98,316.02 824,181 1069.59,181 J4.26 ; 689.28,1102.66 D4.4 765.75,1192.53 746.28,1212 746.28,1308 719.42,1308 716.54,1305.12 C63.2@713.54,1308.12
NetD4_2: D4.2 J4.28 L1.3 | length 1158
  Top Layer w6: L1.3 831.87,1242.13 865.36,1208.63 865.36,1125.2 840.55,1100.39 D4.2 840.55,690.94 1106.3,425.2 1106.3,317.71 J4.28
NetD4_3: D4.3 J4.27 L1.2 | length 1029.6
  Top Layer w6: L1.2 775.59,1229.65 793.83,1211.41 793.83,1198.3 812.99,1179.13 D4.3 840.55,1171.26 814.96,1145.67 814.96,685.04 1053.54,446.46 J4.27
NetFB4_2: FB4.2 J2.1 | length 717.1
  Top Layer w19.68: FB4.2 653.54,1397.64 v1(688.98,1397.64)
  Bottom Layer w15.75: 1094.49,1548.49 J2.1
  Bottom Layer w19.68: v1(688.98,1397.64) 748.03,1338.58 993.79,1338.58 994.4,1339.19 1029.54,1339.19 1030.14,1338.58 1043.31,1338.58 1062.99,1358.27 1062.99,1516.99 1094.49,1548.49
NetFB5_2: FB5.2 J2.4 | length 248.3
  Top Layer w19.68: FB5.2 940.94,1433.07 v1(944.88,1437.01)
  Bottom Layer w19.68: v1(944.88,1437.01) 944.88,1496.06 1017.72,1568.9 J2.4
NetIC1_10: IC1.10 R10.1 | length 111.1
  Top Layer w6: R10.1 2814.02,822.98 2831.66,805.34 2841.61,805.34 2855.12,791.83 IC1.10@2855.12,763.86
NetIC3_9: IC3.9 IC4.14 | length 342
  Top Layer w6: IC4.14 v1(1271.65,696.85) ; v1(1405.51,574.8) 1440.94,574.8 1445.87,579.72 IC3.9
  Bottom Layer w6: v1(1271.65,696.85) 1283.46,696.85 v1(1405.51,574.8)
NetIC4_9: IC4.9 IC5.14 | length 930
  Top Layer w6: IC4.9 1143.7,683.07 1236.22,775.59 v1(1657.48,775.59) ; v1(1657.48,712.6) 1662.31,717.43 1825.87,717.43 1849.41,693.9 IC5.14
  Bottom Layer w6: v1(1657.48,712.6) v1(1657.48,775.59)
NetJ2_2: J2.2 L1.1 | length 521.1
  Top Layer w6: L1.1 775.59,1336.32 793.28,1354 793.28,1423.2 846.79,1476.71 924.62,1476.71 964.57,1516.65 964.57,1535.43 994.13,1565 994.29,1564.84 1064.16,1564.84 v1(1068,1561)
  Bottom Layer w6: v1(1068,1561) 1068,1565.81 1068.9,1566.71 J2.2
NetJ2_3: J2.3 L1.4 | length 476.5
  Top Layer w6: L1.4 807.09,1417.32 854.47,1464.71 947.83,1464.71 976.39,1493.27 976.39,1511.51 997.23,1532.35 1015.47,1532.35 1029.12,1546 v1(1043,1546)
  Bottom Layer w6: v1(1043,1546) 1043,1613.87 J2.3
NetJ4_19: J4.19 PB2.1 | length 2063.2
  Top Layer w6: PB2.1 551.18,1387.8 551.18,1082.68 v1(649.61,984.25) ; v1@905.51,980.01 925.2,960.32 925.2,669.29 1114.17,480.32 1409.45,480.32 1453.54,436.22 J4.19
  Bottom Layer w6: v1(649.61,984.25) v1(905.51,984.25)
NetJ4_20: J4.20 PB3.1 | length 2160.6
  Top Layer w6: v1(649.61,1023.62) 570.87,1102.36 570.87,1417.32 629.92,1476.38 649.61,1476.38 659.45,1486.22 PB3.1 ; v1(925.2,1023.62) 926.04,1022.78 926.04,976.45 937.2,965.29 937.2,676.98 1119.17,495 1417.39,495 1503.94,408.45 1503.94,315.35 J4.20
  Bottom Layer w6: v1(649.61,1023.62) v1(925.2,1023.62)
NetLD1_2: LD1.2 R13.2 | length 352.1
  Top Layer w6: LD1.2 2417.32,1456.42 2417.32,1393.7 2437.01,1374.02 2437.01,1236.22 2453.66,1219.57 R13.2
NetLD1_4: LD1.4 R14.2 | length 246.2
  Top Layer w6: LD1.4 2416.54,1357.2 2416.54,1263 2393.66,1240.12 R14.2
NetLD1_6: LD1.6 R15.2 | length 138.3
  Top Layer w6: R15.2 2333.66,1219.49 2376.97,1262.8 LD1.6
NetLD2_2: LD2.2 R16.2 | length 354.2
  Top Layer w6: LD2.2 2236.22,1442.52 2236.22,1381.89 2242.39,1375.72 2242.39,1257.61 2263.66,1236.34 R16.2
NetLD2_4: LD2.4 R17.2 | length 244.1
  Top Layer w6: LD2.4 2221.54,1357.2 2221.54,1245.17 2203.66,1227.28 R17.2
NetLD2_6: LD2.6 R18.2 | length 136.2
  Top Layer w6: R18.2 2143.66,1210.59 2181.97,1248.9 LD2.6
NetLD3_2: LD3.2 R19.2 | length 352.1
  Top Layer w6: LD3.2 2039.37,1444.37 2039.37,1370.08 2042.54,1366.91 2042.54,1234.55 2063.66,1213.43 R19.2
NetLD3_4: LD3.4 R20.2 | length 246.2
  Top Layer w6: LD3.4 1986.97,1371.3 2017.72,1340.55 2017.72,1330.82 2026.54,1321.99 2026.54,1280.38 2003.66,1257.5 R20.2
NetLD3_6: LD3.6 R21.2 | length 138.3
  Top Layer w6: R21.2 1943.66,1211.38 1986.97,1254.68 LD3.6
NetLD4_2: LD4.2 R22.2 | length 347.9
  Top Layer w6: LD4.2 1834.65,1454.09 1834.65,1370.08 1850.39,1354.33 1850.39,1184.72 R22.2
NetLD4_4: LD4.4 R23.2 | length 250.3
  Top Layer w6: LD4.4 1791.97,1352.74 1831.54,1313.16 1831.54,1280.38 1798.66,1247.5 R23.2
NetLD4_6: LD4.6 R24.2 | length 142.4
  Top Layer w6: R24.2 1738.66,1218.98 1791.97,1272.28 LD4.6
NetLD5_2: LD5.2 R25.2 | length 354.2
  Top Layer w6: LD5.2 1649.61,1444.13 1649.61,1366.14 1652.54,1363.2 1652.54,1249.03 1678.66,1222.91 R25.2
NetLD5_4: LD5.4 R26.2 | length 244.1
  Top Layer w6: LD5.4 1596.97,1375.47 1636.54,1335.9 1636.54,1250.72 1618.66,1232.83 R26.2
NetLD5_6: LD5.6 R27.2 | length 136.2
  Top Layer w6: R27.2 1558.66,1216.14 1596.97,1254.45 LD5.6
NetLD6_2: LD6.2 R28.2 | length 345.9
  Top Layer w6: LD6.2 1401.97,1464.17 1457.54,1408.6 1457.54,1182.57 R28.2
NetLD6_4: LD6.4 R29.2 | length 252.4
  Top Layer w6: LD6.4 1441.54,1357.2 1441.54,1272.25 1403.66,1234.37 R29.2
NetLD6_6: LD6.6 R30.2 | length 144.5
  Top Layer w6: R30.2 1343.66,1217.68 1401.97,1275.98 LD6.6
NetLD7_2: LD7.2 R31.2 | length 350
  Top Layer w6: LD7.2 1248.03,1455.71 1248.03,1358.27 1267.39,1338.91 1267.39,1280.06 1267.72,1279.73 1267.72,1232.28 1278.66,1221.34 R31.2
NetLD7_4: LD7.4 R32.2 | length 248.3
  Top Layer w6: LD7.4 1206.97,1352.74 1246.54,1313.16 1246.54,1258.35 1218.66,1230.47 R32.2
NetLD7_6: LD7.6 R33.2 | length 140.3
  Top Layer w6: R33.2 1158.66,1209.84 1206.97,1258.15 LD7.6
NetLD8_2: LD8.2 R34.2 | length 351.6
  Top Layer w6: LD8.2 1051.54,1457.2 1051.54,1393.34 1072.39,1372.49 1072.39,1176.46 R34.2
NetLD8_4: LD8.4 R35.2 | length 250.3
  Top Layer w6: LD8.4 1051.54,1357.2 1051.54,1276.08 1047.24,1271.78 1047.24,1255.91 1018.66,1227.32 R35.2
NetLD8_6: LD8.6 R36.2 | length 142.4
  Top Layer w6: R36.2 958.66,1243.46 LD8.6
P3V3: C1.1 C2.1 C3.1 C59.1 FB3.1 IC1.28 IC1.43 IC1.44 IC1.45 IC3.10 IC3.16 IC4.10 IC4.16 IC5.10 IC5.16 J1.D1 J1.D3 J4.21 J4.22 SW1.2 | length 9593.8
  Top Layer w12: v1(2606.3,206) 2606.3,314.96 2645.67,354.33 2784.07,354.33 2803.4,335 2861,335 2868.11,342.11 2868.11,362.2 2874.8,368.9 IC1.28@2874.8,423.31 ; J1.D3@2645.31,1614.17 2645.31,1700.43 2677.17,1732.28 2881.89,1732.28 2940,1674.17 3143.31,1674.17 3143.31,1647 3011,1514.69 3011,1405 3038,1378 3101.48,1378 3175.58,1303.9 3176.42,1303.9 3240.16,1240.16 3240.16,681.1 FB3.1@3200.79,641.73 ; IC1.43@3094.29,603.43 3158.54,603.43 FB3.1@3178.23,623.11 ; IC1.44@3094.29,623.11 FB3.1@3178.23,623.11 ; IC1.45@3094.29,642.8 3180.04,642.8 FB3.1 FB3.1@3178.23,623.11
  Top Layer w18: IC4.10 1169.29,566.93 1222.16,514.06 v1(1346.61,514.06) v1(1375,542.46) 1471.46,542.46 IC3.10 ; v1(1322.83,586.61) IC4.16 ; IC3.16 1625,583.66 v1(1625.98,582.68) ; v2(1625,1651) 1673,1699 2419,1699 2527,1591 2527,868 2290.89,631.89 IC5.16 v1@1900.59,563.98 ; v1(1631,510) 1722,510 1747.05,535.05 v1(1747.05,560.04) IC5.10 ; v1(3113,319) 3159.67,365.67 3159.67,368.33 3188.98,397.64 FB3.1
  Top Layer w30: v1(1349,451) 1349,409 1353.54,404.46 J4.21 J4.22 1353.54,200.46 1439,115 v1(2357,115)
  Bottom Layer w18: v1@1370.08,539.37 1476.38,539.37 1539.37,476.38 1629.92,476.38 1629.92,578.74 v1(1625.98,582.68) ; SW1.2 1573.14,1651 v2(1625,1651) ; v1(1747.05,560.04) v1(1903.04,560.04) ; v1@2607,206 v1(2607,178) 2607,173.93 2606.3,173.23 2606.3,110.24 2682.54,34 2885,34 2933.07,82.07 2933.07,314.96 3106.3,314.96 v1(3133.86,342.52)
  Bottom Layer w30: v1(1322.83,586.61) 1349,560.45 v1(1349,451) v1(1390,451) ; v1(2314,117) 2316,115 v1(2357,115) 2387.67,145.67 2578.74,145.67 v1@2606.3,173.23
P3V3A: C26.1 C27.1 C29.1 C30.1 C31.1 FB3.2 IC1.4 IC1.8 IC1.11 IC1.15 IC1.17 IC1.21 R7.2 R8.2 R9.1 | length 2257.5
  Top Layer w12: v1(2624.45,722.01) C26.1 2638.23,659.8 C29.1@2679.02,659.8 ; v1(2645.67,515.75) 2655.51,525.59 2655.51,543.31 2656.57,544.37 IC1.21@2753.74,544.37 ; IC1.17@2753.74,623.11 2695.79,623.11 2679.02,639.88 C29.1@2679.02,659.8 ; IC1.15@2753.74,662.48 2681.69,662.48 C29.1@2679.02,659.8 ; IC1.11@2835.43,763.86 2835.43,709.45 2845.87,699.01 2857.1,699.01 2866.95,689.16 2885.05,689.16 2889.94,694.06 2897.84,701.95 2897.84,712.39 ; v1(2893.7,858.27) 2892.8,857.36 2892.8,833.58 2894.49,831.89 2894.49,723.4 2897.84,720.05 2897.84,712.39 ; C30.1@2984.25,828.74 2973.23,817.72 2973.23,721.26 2952.76,700.79 2937.01,700.79 ; v1(3003.94,889.76) R8.2 ; R9.1 3187.8,931.89 3152.36,896.46 R7.2 3188.98,853.15 FB3.2 3157.48,736.22 3070.9,736.22 3047.83,713.14 3047.83,712.83 2986.58,651.58 v1(2940.94,651.58) 2940.94,696.85 2937.01,700.79 ; 2897.84,712.39 2909.45,700.79 2937.01,700.79
  Bottom Layer w12: v1(2624.45,722.01) 2688.98,657.48 ; v1(2645.67,515.75) 2645.67,614.17 2688.98,657.48 ; v1(2893.7,858.27) 2925.2,889.76 v1(3003.94,889.76) ; v1(2940.94,651.58) 2910.32,620.95 2800.91,620.95 2799.82,622.05 2724.41,622.05 2688.98,657.48
RESETN: IC1.37 J4.10 | length 1688.9
  Top Layer w6: J4.10 1953.54,227.56 2015.75,165.35 2187.75,165.35 2214.11,139 2366.94,139 2482.51,23.43 2882.77,23.43 2963,103.66 2963,250.4 3086.8,374.2 3126.2,374.2 3145.67,393.67 3145.67,472.44 3132.8,485.32 IC1.37@3094.29,485.32
RJ45_GRN: IC1.27 J1.D2 | length 1453.6
  Top Layer w6: v1(2801,804) 2669,936 2669,1238.94 2796.2,1366.14 2796.2,1367.07 J1.D2@3043.31,1614.17 ; IC1.27@2855.12,423.31 2855.12,676.38 2860,671.5 v1(2860,667)
  Bottom Layer w6: v1(2801,804) 2805,800 2805,713.23 2827.63,690.61 2840.89,690.61 2860,671.5 v1(2860,667)
RJ45_RX_C_N: C20.2 J1.6 | length 331.5
  Top Layer w10: J1.6@2819.31,1131.17 2859.52,1131.17 2876.81,1148.46 2876.81,1148.78 2901.7,1173.67 2936.91,1173.67 2936.98,1173.6 2946.4,1173.6 2962.18,1157.82 2962.18,1148.4 2970,1140.58 2970,1020 2982.13,1007.87 C20.2
RJ45_RX_C_P: C19.2 J1.4 | length 139.5
  Top Layer w10: J1.4@2919.31,1131.17 2919.31,1084.63 2940.94,1062.99 2940.94,1028.94 2924.02,1012.02 C19.2
RJ45_RX_N: C20.1 IC1.5 R12.2 | length 251
  Top Layer w10: IC1.5@2953.54,763.86 2953.54,801.34 2953.7,801.5 2953.7,885.24 2966.1,897.64 2966.1,922.8 C20.1 2998.82,934.25 R12.2
RJ45_RX_P: C19.1 IC1.6 R11.2 | length 249.4
  Top Layer w10: R11.2 2913.66,934.25 C19.1 2946.1,922.52 2946.1,905.92 2933.7,893.52 2933.7,801.5 2933.86,801.34 IC1.6@2933.86,763.86
RJ45_TX_N: IC1.1 J1.3 R7.1 | length 874.1
  Top Layer w10: J1.3@2969.31,1231.17 3011.5,1273.36 3011.5,1307.5 3042.9,1338.9 3098.84,1338.9 3153.86,1283.87 3153.86,1134.17 3102.52,1082.83 3102.52,902.6 R7.1 3102.68,877.09 3102.68,853.92 3075.53,826.77 3039.37,826.77 3032.28,819.69 IC1.1@3032.28,763.86
RJ45_TX_P: IC1.2 J1.1 R8.1 | length 806.1
  Top Layer w10: IC1.2@3012.6,763.86 3012.6,828.28 3031.09,846.77 3067.24,846.77 3082.68,862.2 3082.68,876.77 R8.1 3082.52,902.6 3082.52,1091.12 3133.86,1142.46 3133.86,1275.59 3090.55,1318.9 3051.18,1318.9 3031.5,1299.21 3031.5,1268.98 J1.1@3069.31,1231.17
RJ45_YEL: IC1.25 J1.D4 | length 1426.9
  Top Layer w6: v1(2705,723) 2704,723 2693,734 2693,822.75 2657,858.75 2657,1271.17 2745.31,1359.48 2745.31,1419 2768,1441.69 2768,1541 2745.31,1563.69 J1.D4@2745.31,1674.17 ; IC1.25@2815.75,423.31 2815.75,587.4 2834.64,606.29 v1@2834.64,660